# Altium PCB LaserController.PcbDoc
Units mil, origin at the board's own origin, x right, y up, seen from the top; angles counter-clockwise.
Board outline 1463.27 x 890 mil, 2 copper layers (Top Layer, Bottom Layer); 13 components, 16 nets, 83 pads, 18 vias.
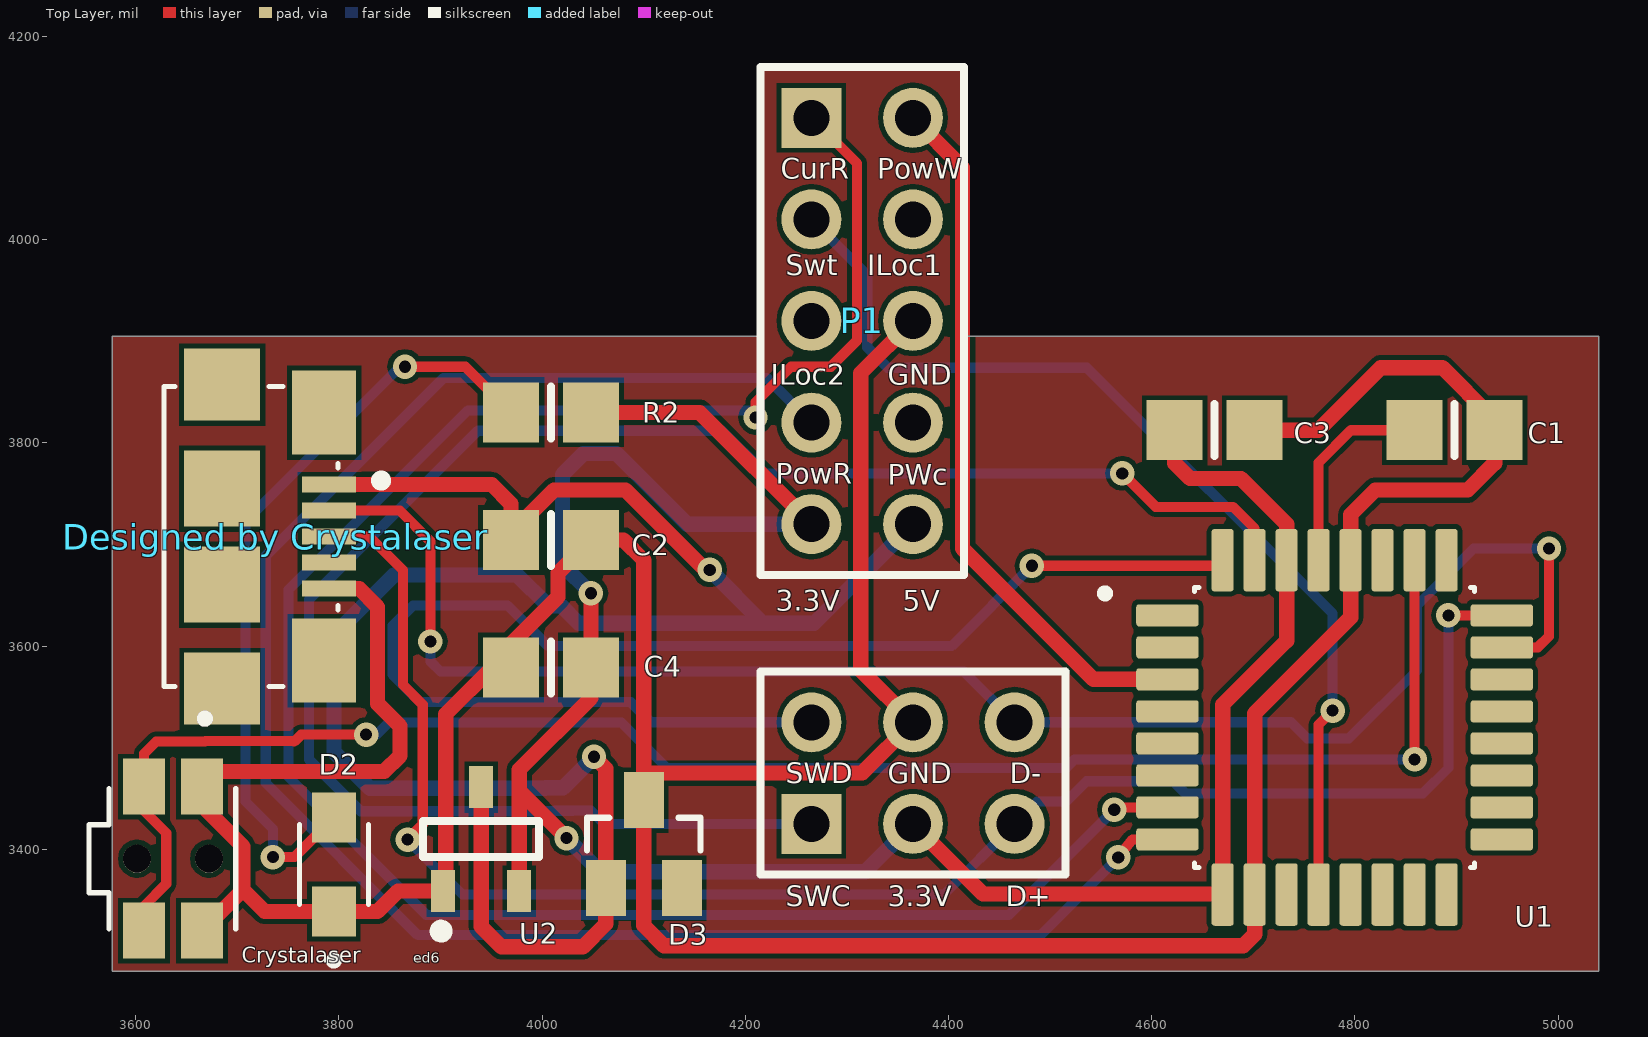
[diagram p0: Top Layer view]
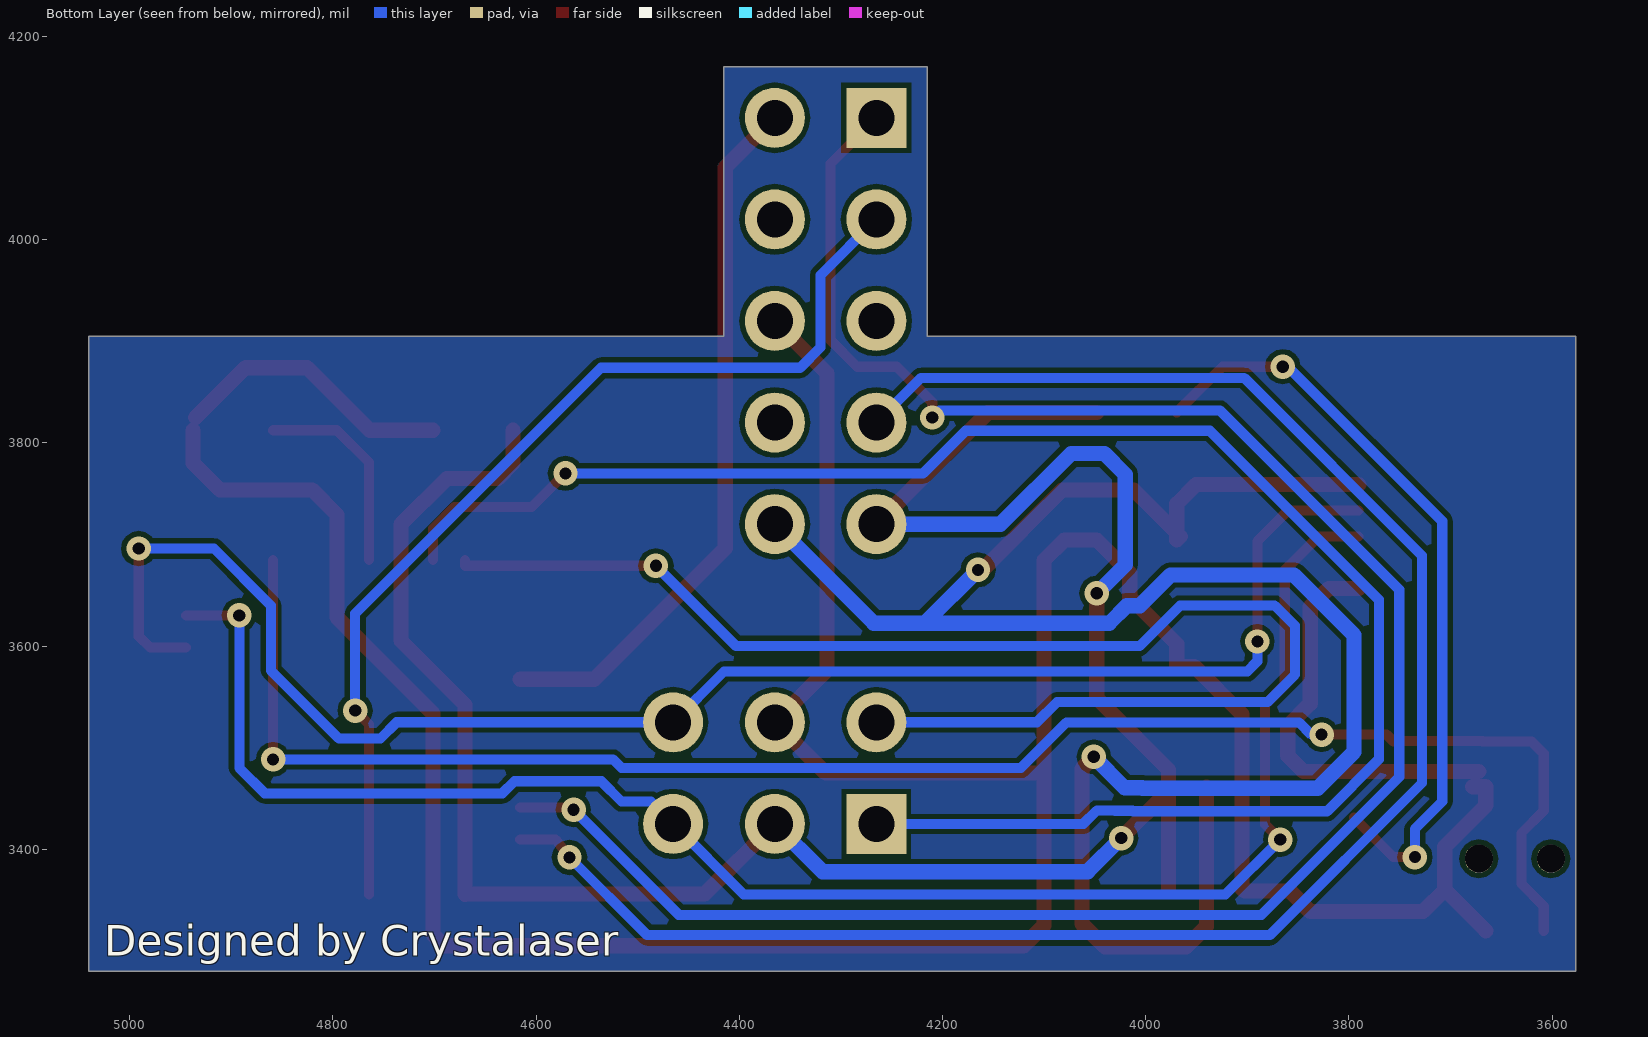
[diagram p1: Bottom Layer view, seen from below]

## Layer stack, top to bottom
Top Solder: solder mask 0.4, Solder Resist, Dk 3.5
Top Layer: signal copper 1.4
Dielectric 1: dielectric 12.6, FR-4, Dk 4.8
Bottom Layer: signal copper 1.4
Bottom Solder: solder mask 0.4, Solder Resist, Dk 3.5

## Board outline
3576.73,3280 3576.73,3905 4215,3905 4215,4170 4415,4170 4415,3905 5040,3905 5040,3280

## Design rules (kind name [scope] priority, off if disabled: settings)
Clearance Clearance_inpolygon [InPolygon] p1: gap=5 ignorepadtopadclearanceinfootprint=TRUE
Clearance [All] p2: gap=10 ignorepadtopadclearanceinfootprint=TRUE except(0: Arc-Hole Track-Hole SMDPad-Hole THPad-Hole Via-Hole Fill-Hole Poly-Hole Region-Hole Text-Hole)
PolygonConnect [All] p1: connectstyle=Relief reliefconductorwidth=10 reliefentries=4 polygonreliefangle="90 Angle" airgapwidth=10
RoutingCorners [All] p1: cornerstyle=Round minsetback=100 maxsetback=100
RoutingVias [All] p1: holewidth=12 width=24 viastyle="Through Hole" minholewidth=12 minwidth=24 maxholewidth=12 maxwidth=24
SolderMaskExpansion [All] p1: expansion=4
Width [All] p1: maxlimit=15 minlimit=8 preferedwidth=10 minimp=50.000000 maximp=50.000000 favimp=50.000000
29 further rules are at their usual default settings.

## Classes and differential pairs
component class LaserController: C1 C2 C3 C4 D2 D3 R2 U1 U2

## Components (designator, comment, footprint, x,y, rotation, side; value= is the part's Value field where it differs from the comment)
C1 "Cap" 6-0805_M 4898.11,3812.5 r0 top value=1uF
C2 "Cap" 6-0805_M 4008.68,3704.47 r180 top value=10uF
C3 "Cap" 6-0805_M 4661.89,3812.5 r180 top value=10uF
C4 "Cap" 6-0805_M 4008.68,3578.94 r0 top value=1uF
D2 "LED" DIO_SMLMN2WB1CW1C 3795,3385 r90 top
D3 "BAT54S" SOT23 4100,3405 r0 top
"Designed by Crystalaser" "MicroUSB" AMPHENOL_10118192-0001LF 3790.32,3707.76 r270 top (schematic designator J1)
P1 "Header 5X2" HDR2X5 4265,4120 r270 top locked
R2 "1.6K" 6-0805_M 4008.68,3830 r0 top
S "EVQ-P7L01P" SW_EVQ-P7L01P 3636.63,3390.71 r270 top
SWC "Header 3X2" HDR2X3 4265,3425 r0 top (schematic designator P2)
U1 "ATSAMD21E18A-AU" QFP80P900X900X120-32N 4780,3520 r0 top
U2 "AP2210N-3.3TRG1" SOT95P280X145-3N 3940,3410 r90 top

## Footprints (in the part's own frame and the unit in brackets; to place one, negate y for a bottom-side part, rotate by r counter-clockwise, add the part's x,y. Pads: shape width x height; smd on the part's side, far side on the other; paste and mask are expansions set on the pad)
6-0805_M [mm] "Chip Resistor, Body 2.0x1.2mm, IPC Low Density"
  rect 1.4x1.5 smd: 1(-1,0) 2(1,0)
  silkscreen extent 0,-0.65 0,0.65, body extent -1.07,-0.7 1.07,0.7, height 0.7
AMPHENOL_10118192-0001LF [mm]
  rect 0.4x1.35 smd: 1(-1.3,0) 2(-0.65,0) 3(0,0) 4(0.65,0) 5(1.3,0)
  rect 2.1x1.6 smd: SH1(-3.1,-0.125) SH2(3.1,-0.125)
  rect 1.8x1.9 smd: SH3(-3.8,-2.675) SH6(3.8,-2.675)
  rect 1.9x1.9 smd: SH4(-1.2,-2.675) SH5(1.2,-2.675)
  silkscreen extent -3.75,-4.12 3.75,1.4
DIO_SMLMN2WB1CW1C [mm]
  rect 1.25x1.1 smd: A(1.175,0) C(-1.175,0)
  silkscreen extent -2.5,-0.86 1,0.86, body extent -1,-0.62 1,0.63, height 0.78
HDR2X3 [mm] "Connector; Header; 3x2 Position"
  rect 1.5x1.5 hole 0.9: 1(0,0)
  round 1.5 hole 0.9: 2(0,2.54) 3(2.54,0) 4(2.54,2.54) 5(5.08,0) 6(5.08,2.54)
  silkscreen extent -1.27,-1.27 6.35,3.81
HDR2X5 [mm] "Connector; Header; 5x2 Position"
  rect 1.5x1.5 hole 0.9: 1(0,0)
  round 1.5 hole 0.9: 2(0,2.54) 3(2.54,0) 4(2.54,2.54) 5(5.08,0) 6(5.08,2.54) 7(7.62,0) 8(7.62,2.54) 9(10.16,0) 10(10.16,2.54)
  silkscreen extent -1.27,-1.27 11.43,3.81, body extent -1.52,-1.24 11.68,3.71, height 8.51
QFP80P900X900X120-32N [mm]
  rrect25% 1.56x0.55 smd: 1(-4.18,2.8) 2(-4.18,2) 3(-4.18,1.2) 4(-4.18,0.4) 5(-4.18,-0.4) 6(-4.18,-1.2) 7(-4.18,-2) 8(-4.18,-2.8) 17(4.18,-2.8) 18(4.18,-2) 19(4.18,-1.2) 20(4.18,-0.4) 21(4.18,0.4) 22(4.18,1.2) 23(4.18,2) 24(4.18,2.8)
  rrect25% 0.55x1.56 smd: 9(-2.8,-4.18) 10(-2,-4.18) 11(-1.2,-4.18) 12(-0.4,-4.18) 13(0.4,-4.18) 14(1.2,-4.18) 15(2,-4.18) 16(2.8,-4.18) 25(2.8,4.18) 26(2,4.18) 27(1.2,4.18) 28(0.4,4.18) 29(-0.4,4.18) 30(-1.2,4.18) 31(-2,4.18) 32(-2.8,4.18)
  silkscreen extent -5.84,-3.5 3.5,3.5, body extent -4.5,-4.5 4.5,4.5, height 0.53
SOT23 [mm]
  rect 1x1.4 smd: 1(-0.95,-1.1) 2(0.95,-1.1) 3(0,1.1)
  silkscreen extent -1.42,-0.15 1.42,0.66, body extent -1.45,-1.24 1.45,1.16, height 1.06
SOT95P280X145-3N [mm]
  rect 1.05x0.6 smd: 1(-1.3,0.95) 2(-1.3,-0.95) 3(1.3,0)
  silkscreen extent -2.52,-1.45 0.45,1.45
SW_EVQ-P7L01P [mm]
  rect 1.4x1.05 smd: 1_1(-1.8,0.725) 1_2(1.8,0.725) 2_1(-1.8,-0.725) 2_2(1.8,-0.725)
  round 0.7 hole 0.7 unplated: ""(0,0.9) ""(0,-0.9)
  silkscreen extent -3.6,-2.1 1.75,1.57

## Part data
C1 C2 C3 C4: "Capacitor", LatestRevisionDate=17-Jul-2002, LatestRevisionNote="Re-released for DXP Platform.", PackageDescription="Radial Cap, Thru-Hole; 2 Leads; 0.3 in Pin Spacing", PackageReference=RAD-0.3, Published=8-Jun-2000, Publisher="Altium Limited"
D2: library part SMLMN2WB1CW1C, "White LED Indication - Discrete 2.9V 0805 _2012 Metric_", Package="0805 Rohm Semiconductor", Availability=Unavailable, MF="Rohm Semiconductor", MP=SMLMN2WB1CW1C, Price=None, SnapEDA_Link=https://www.snapeda.com/parts/SMLMN2WB1CW1C/Rohm/view-part/3217279/?ref=snap
D3: "Diode Array 1 Pair Series Connection Schottky 30V 200mA Surface Mount TO-236-3, SC-59, SOT-23-3", Package="SOT-23-3 ON Semiconductor", Availability=Unavailable, MF="ON Semiconductor", MP=BAT54S, Price=None, SnapEDA_Link=https://www.snapeda.com/parts/BAT54S/ON%20Semiconductor/view-part/1737355/?ref=snap
"Designed by Crystalaser": library part 10118192-0001LF, "USB - micro B USB 2.0 Receptacle Connector 5 Position Surface Mount, Right Angle", Package=None, Availability=Unavailable, MF="Amphenol ICC", MP=10118192-0001LF, Price=None, SnapEDA_Link=https://www.snapeda.com/parts/10118192-0001LF/Amphenol%20FCI/view-part/2897676/?ref=snap
P1: "Header, 5-Pin, Dual row", LatestRevisionDate=17-Jul-2002, LatestRevisionNote="Re-released for DXP Platform.", Publisher="Altium Limited"
R2: library part Res3, "Resistor", LatestRevisionDate=29-May-2009, LatestRevisionNote="IPC-7351 Footprint Added.", PackageDescription="Chip Resistor", PackageReference=J1-0603, Published=8-Jun-2000, Publisher="Altium Limited"
S: "Tactile Switch SPST-NO Side Actuated Surface Mount, Right Angle", Package=None, Digi-Key_Part_Number=P16769CT-ND, Digi-Key_Purchase_URL=https://www.digikey.co.nz/product-detail/en/panasonic-electronic-components/EVQ-P7L01P/P16769CT-ND/4429462?utm_source=snapeda&utm_medium=aggregator&utm_campaign=symbol, MF="Panasonic Electronic Components", MP=EVQ-P7L01P, SnapEDA_Link=https://www.snapeda.com/parts/EVQ-P7L01P/Panasonic%20Electronic%20Components/view-part/3622449/?ref=snap
SWC: "Header, 3-Pin, Dual row", LatestRevisionDate=17-Jul-2002, LatestRevisionNote="Re-released for DXP Platform.", Publisher="Altium Limited"
U1: "ARM? Cortex?-M0+ SAM D21E Microcontroller IC 32-Bit 48MHz 256KB (256K x 8) FLASH 32-TQFP (7x7)", Package="TQFP-32 Microchip", Availability=Unavailable, DigiKey-Purchase-URL=https://snapeda.com/shop?store=DigiKey&id=1758526, MF=Microchip, Mouser-Purchase-URL=https://snapeda.com/shop?store=Mouser&id=1758526, MP=ATSAMD21E18A-AU, Price=None, SnapEDA_Link=https://www.snapeda.com/parts/ATSAMD21E18A-AU/Microchip/view-part/1758526/?ref=snap
U2: "Linear Voltage Regulator IC 1 Output 300mA SOT-23-3", Package="SOT-23 Diodes Inc.", Availability=Unavailable, MF="Diodes Inc.", MP=AP2210N-3.3TRG1, Price=None, SnapEDA_Link=https://www.snapeda.com/parts/AP2210N-3.3TRG1/Diodes%20Inc./view-part/492437/?ref=snap

## Via types
v1: diameter 24, hole 12, Top Layer to Bottom Layer, 18 vias

## Nets (pads, with @x,y where several pads share a name; then routed paths per layer and width w, separated by ;. In a path a pad name is that pad's centre, name@x,y a point inside that pad or via, vN(x,y) a via of type N, cw(c..) or ccw(c..) an arc to the next point about the centre after c; other vN are vias at no path point)
3.3V: C3.2 C4.2 P1.9 R2.2 SWC.3 U1.9 U1.30 U2.2 | length 2327.4
  Top Layer w15: U2.2 3977.4,3478.27 4048.05,3548.92 C4.2 4048.05,3651.95 v1(4048,3652) ; 3977.5,3457.5 v1(4024,3411) ; R2.2 4155,3830 P1.9 ; SWC.3 4434,3356 U1.9@4669.76,3356 ; C3.2 4622.52,3780 4637.52,3765 4687.76,3765 4732.76,3720 U1.30 4732.76,3605.26 4669.76,3542.26 U1.9@4669.76,3356 ; U1.9 U1.9@4669.76,3356
  Bottom Layer w15: v1(4024,3411) 4057.03,3377.97 4317.97,3377.97 SWC.3 ; v1(4048,3652) 4020,3680 4020,3769 4040.5,3789.5 4073.22,3789.5 4142.72,3720 P1.9
A0_PA02: P1.2 U1.3 | length 699.1
  Top Layer w15: P1.2 4413.83,4071.17 4413.83,3696.17 4542.75,3567.25 U1.3
A1_PA09: P1.3 U1.12 | length 997.6
  Top Layer w10: U1.12 4764.25,3522.75 v1(4778,3536.5)
  Bottom Layer w10: P1.3 4320,3965 4320,3894 4340,3874 4536,3874 4778,3632 v1(4778,3536.5)
A2_PA08: U1.11
A3_PA07: P1.7 U1.8 | length 1841.3
  Top Layer w10: v1(4567,3392) 4581,3409.76 U1.8
  Bottom Layer w10: P1.7 4221,3864 3903,3864 3728,3689 3728,3465.18 3877.71,3315.47 4490.47,3315.47 v1(4567,3392)
A4_PA06: P1.1 U1.7 | length 2062.9
  Top Layer w10: v1(4210,3825) 4210,3840 4245,3875 4284,3875 4310,3901 4310,4075 P1.1 ; v1(4563,3439) 4565.26,3441.26 U1.7
  Bottom Layer w10: v1(4210,3825) 4203,3832 3927,3832 3750.39,3655.39 3750.39,3471.07 3886,3335.47 4459.47,3335.47 v1(4563,3439)
D+: "Designed by Crystalaser.3" SWC.5 U1.24 | length 1677
  Top Layer w10: 3790.32,3707.76 3830,3707.76 3863,3674.76 3863,3561.87 3882.5,3542.37 3882.5,3424.5 v1(3867.53,3409.53) ; v1(4892,3630.24) U1.24
  Bottom Layer w10: v1(3867.53,3409.53) 3921.58,3355.47 4395.47,3355.47 SWC.5 4487,3447 4515.79,3447 4535.72,3466.93 4621.18,3466.93 4633.11,3455 4867,3455 4892,3480 v1(4892,3630.24)
D-: "Designed by Crystalaser.2" SWC.6 U1.23 | length 1615.1
  Top Layer w10: 3790.32,3733.35 3860,3733.35 3890,3703.35 v1(3890,3604.53) ; U1.23 4980,3598.74 4991,3609.74 v1(4991,3696)
  Bottom Layer w10: v1(3890,3604.53) 3890,3585 3900,3575 4415,3575 SWC.6 4737,3525 4753,3509 4794,3509 4861,3576 4861,3640 4917,3696 v1(4991,3696)
GND: "Designed by Crystalaser.5" C1.2 C2.1 C3.1 C4.1 D2.C D3.3 P1.6 S.1_1 S.1_2 SWC.4 U1.10 U1.28 U2.1 | length 3924.1
  Top Layer w15: S.1_2 3705.5,3360.17 ; S.1_1@3672.06,3476.5 3844.5,3476.5 3860,3492 3860,3521.33 3838,3543.33 3838,3638.57 3820,3656.57 3790.32,3656.57 ; S.1_1@3678,3461.57 S.1_1 3665.17,3443.11 3705.5,3402.78 3705.5,3360.17 ; C4.1@3966.36,3580 3952.07,3580 C4.1@3951.01,3578.94 ; P1.6 4313.51,3868.51 4313.51,3576.49 SWC.4 4315,3475 D3.3@4100,3475 ; C3.1 4764,3812.5 4825.5,3874 4886,3874 C1.2@4935,3825 ; C1.2 4937.48,3780 4911,3753.52 4820,3753.52 4795.75,3729.27 U1.28 4795.75,3628.25 4701.26,3533.76 U1.10 4701.26,3316.26 4690,3305 4120,3305 4100,3325 D3.3 D3.3@4100,3475 ; 3705.5,3360.17 3726.93,3338.74 D2.C 3838,3338.74 3858.08,3358.82 U2.1 3905,3361.22 3905,3532.93 C4.1@3951.01,3578.94 ; C4.1@3951.01,3578.94 C4.1 3969.31,3602 4015.64,3648.33 4015.64,3672.06 C2.1 4080,3704.47 4100,3684.47 D3.3@4100,3475
NetC1_1: C1.1 U1.29 | length 203.8
  Top Layer w10: U1.29 4764.25,3780.76 4796,3812.5 C1.1
NetD2_A: D2.A R2.1 | length 761
  Top Layer w10: v1(3735,3392.28) 3756.03,3392.28 D2.A ; v1(3865,3875) 3924.31,3875 R2.1
  Bottom Layer w10: v1(3735,3392.28) 3735,3420 3708,3447 3708,3723 3860,3875 v1(3865,3875)
PA10_13: U1.13
RESET: S.2_1 S.2_2 U1.26 | length 1674.4
  Top Layer w10: S.2_2 3608.08,3344 3630,3365.92 3630,3416 3608.08,3437.92 S.2_1 3608.08,3494.08 3620,3506 3668.18,3506 3668.68,3506.5 3755.41,3506.5 3755.91,3506 3762.78,3512.87 v1(3826.73,3512.87) ; v1(4858.74,3488.47) U1.26
  Bottom Layer w10: v1(3826.73,3512.87) 3836.87,3512.87 3848.87,3524.87 4078,3524.87 4122.87,3480 4515.72,3480 4524.2,3488.47 v1(4858.74,3488.47)
SWC: SWC.1 U1.31 | length 1749.5
  Top Layer w10: v1(4571,3770) 4604,3737 4680,3737 4701.26,3715.74 U1.31
  Bottom Layer w10: SWC.1 4061.25,3425 4048,3438.25 4030.07,3438.25 4029.82,3438 4012.82,3438 4012.32,3437.5 3821.36,3437.5 3770.39,3488.46 3770.39,3610 3770.39,3618.21 3770.39,3645.63 3936.77,3812 4177,3812 4219,3770 v1(4571,3770)
SWD: SWC.2 U1.32 | length 1359.5
  Top Layer w10: v1(4482,3679) 4669.76,3679 U1.32
  Bottom Layer w10: SWC.2 4107,3525 4087.13,3544.87 3880,3544.87 3853,3571.87 3853,3620 3873,3640 3966,3640 4006,3600 4403,3600 v1(4482,3679)
VBAT: "Designed by Crystalaser.1" C2.2 D3.1 P1.10 U2.3 | length 2047.4
  Top Layer w15: 3790.32,3758.94 3950.37,3758.94 3969.31,3740 C2.2@3969.31,3711.31 ; U2.3 3940,3324 3960,3304 4040,3304 4062.6,3326.6 D3.1 4062.6,3479.4 v1(4051,3491) ; C2.2@3965.89,3707.89 C2.2@3969.31,3711.31 ; C2.2 C2.2@3969.31,3711.31 ; v1(4165,3675) 4160.74,3675 4082.06,3753.68 4011.68,3753.68 C2.2@3969.31,3711.31
  Bottom Layer w15: v1(4051,3491) 4020.5,3460.5 4003.5,3460.5 4003,3460 3830.68,3460 3795,3495.68 3795,3611 3854,3670 3975.41,3670 4005.63,3639.78 4018.5,3639.78 4035.78,3622.5 4217.5,3622.5 ; v1(4165,3675) 4217.5,3622.5 ; P1.10 4267.5,3622.5 4217.5,3622.5
pads on no net: "Designed by Crystalaser.4" "Designed by Crystalaser.SH1" "Designed by Crystalaser.SH2" "Designed by Crystalaser.SH3" "Designed by Crystalaser.SH4" "Designed by Crystalaser.SH5" "Designed by Crystalaser.SH6" D3.2 P1.4 P1.5 P1.8 S. U1.1 U1.2 U1.4 U1.5 U1.6 U1.14 U1.15 U1.16 U1.17 U1.18 U1.19 U1.20 U1.21 U1.22 U1.25 U1.27

## Polygon pours and split planes (outlines as drawn)
no net on Top Layer (solid, pour order 20): 3576.73,3905 4215,3905 4215,4170 4415,4170 4415,3905 5040,3905 5040,3280 3576.73,3280
no net on Bottom Layer (solid, pour order 22): 3576.73,3905 4215,3905 4215,4170 4415,4170 4415,3905 5040,3905 5040,3280 3576.73,3280

## Silkscreen, mask and mechanical layers (free items; w line width, h text height)
Top Overlay:
  text "CurR" at 4235,4060 h20
  text "PowW" at 4330,4060 h20
  text "Swt" at 4240,3965 h20
  text "ILoc1" at 4320,3965 h20
  text "ILoc2" at 4225,3857.36 h20
  text "GND" at 4340,3857.36 h20
  text "PowR" at 4229.73,3760 h20
  text "PWc" at 4340,3758.94 h20
  text "3.3V" at 4230,3635 h20
  text "5V" at 4355,3635 h20
  text "D-" at 4460,3465 h20
  text "D+" at 4456.5,3344 h20
  text "Crystalaser" at 3704.11,3288.23 h15
  text "ed6" at 3873.21,3288.23 h10
Mechanical 1:
  the board outline again, w10

## Text inside footprints (layer, text, board x,y; h text height)
SWC: Top Overlay "SWD" at 4240,3465 h20; Top Overlay "GND" at 4340,3465 h20; Top Overlay "3.3V" at 4340,3344 h20